# Altium PCB DAP-PCB-REV-2.PcbDoc (part 3 of 4)
Units mil, origin at the board's own origin, x right, y up, seen from the top; angles counter-clockwise.
Board outline 2165.35 x 2165.35 mil, 6 copper layers (Top Layer (Sig), L2 (GND), L3 (Sig), L4 (Sig), L5 (GND), Bottom Layer (Sig)), stack 34.252 mil thick; 270 components, 172 nets, 891 pads, 299 vias.
Unrouted connection lines stored in the file: 138.
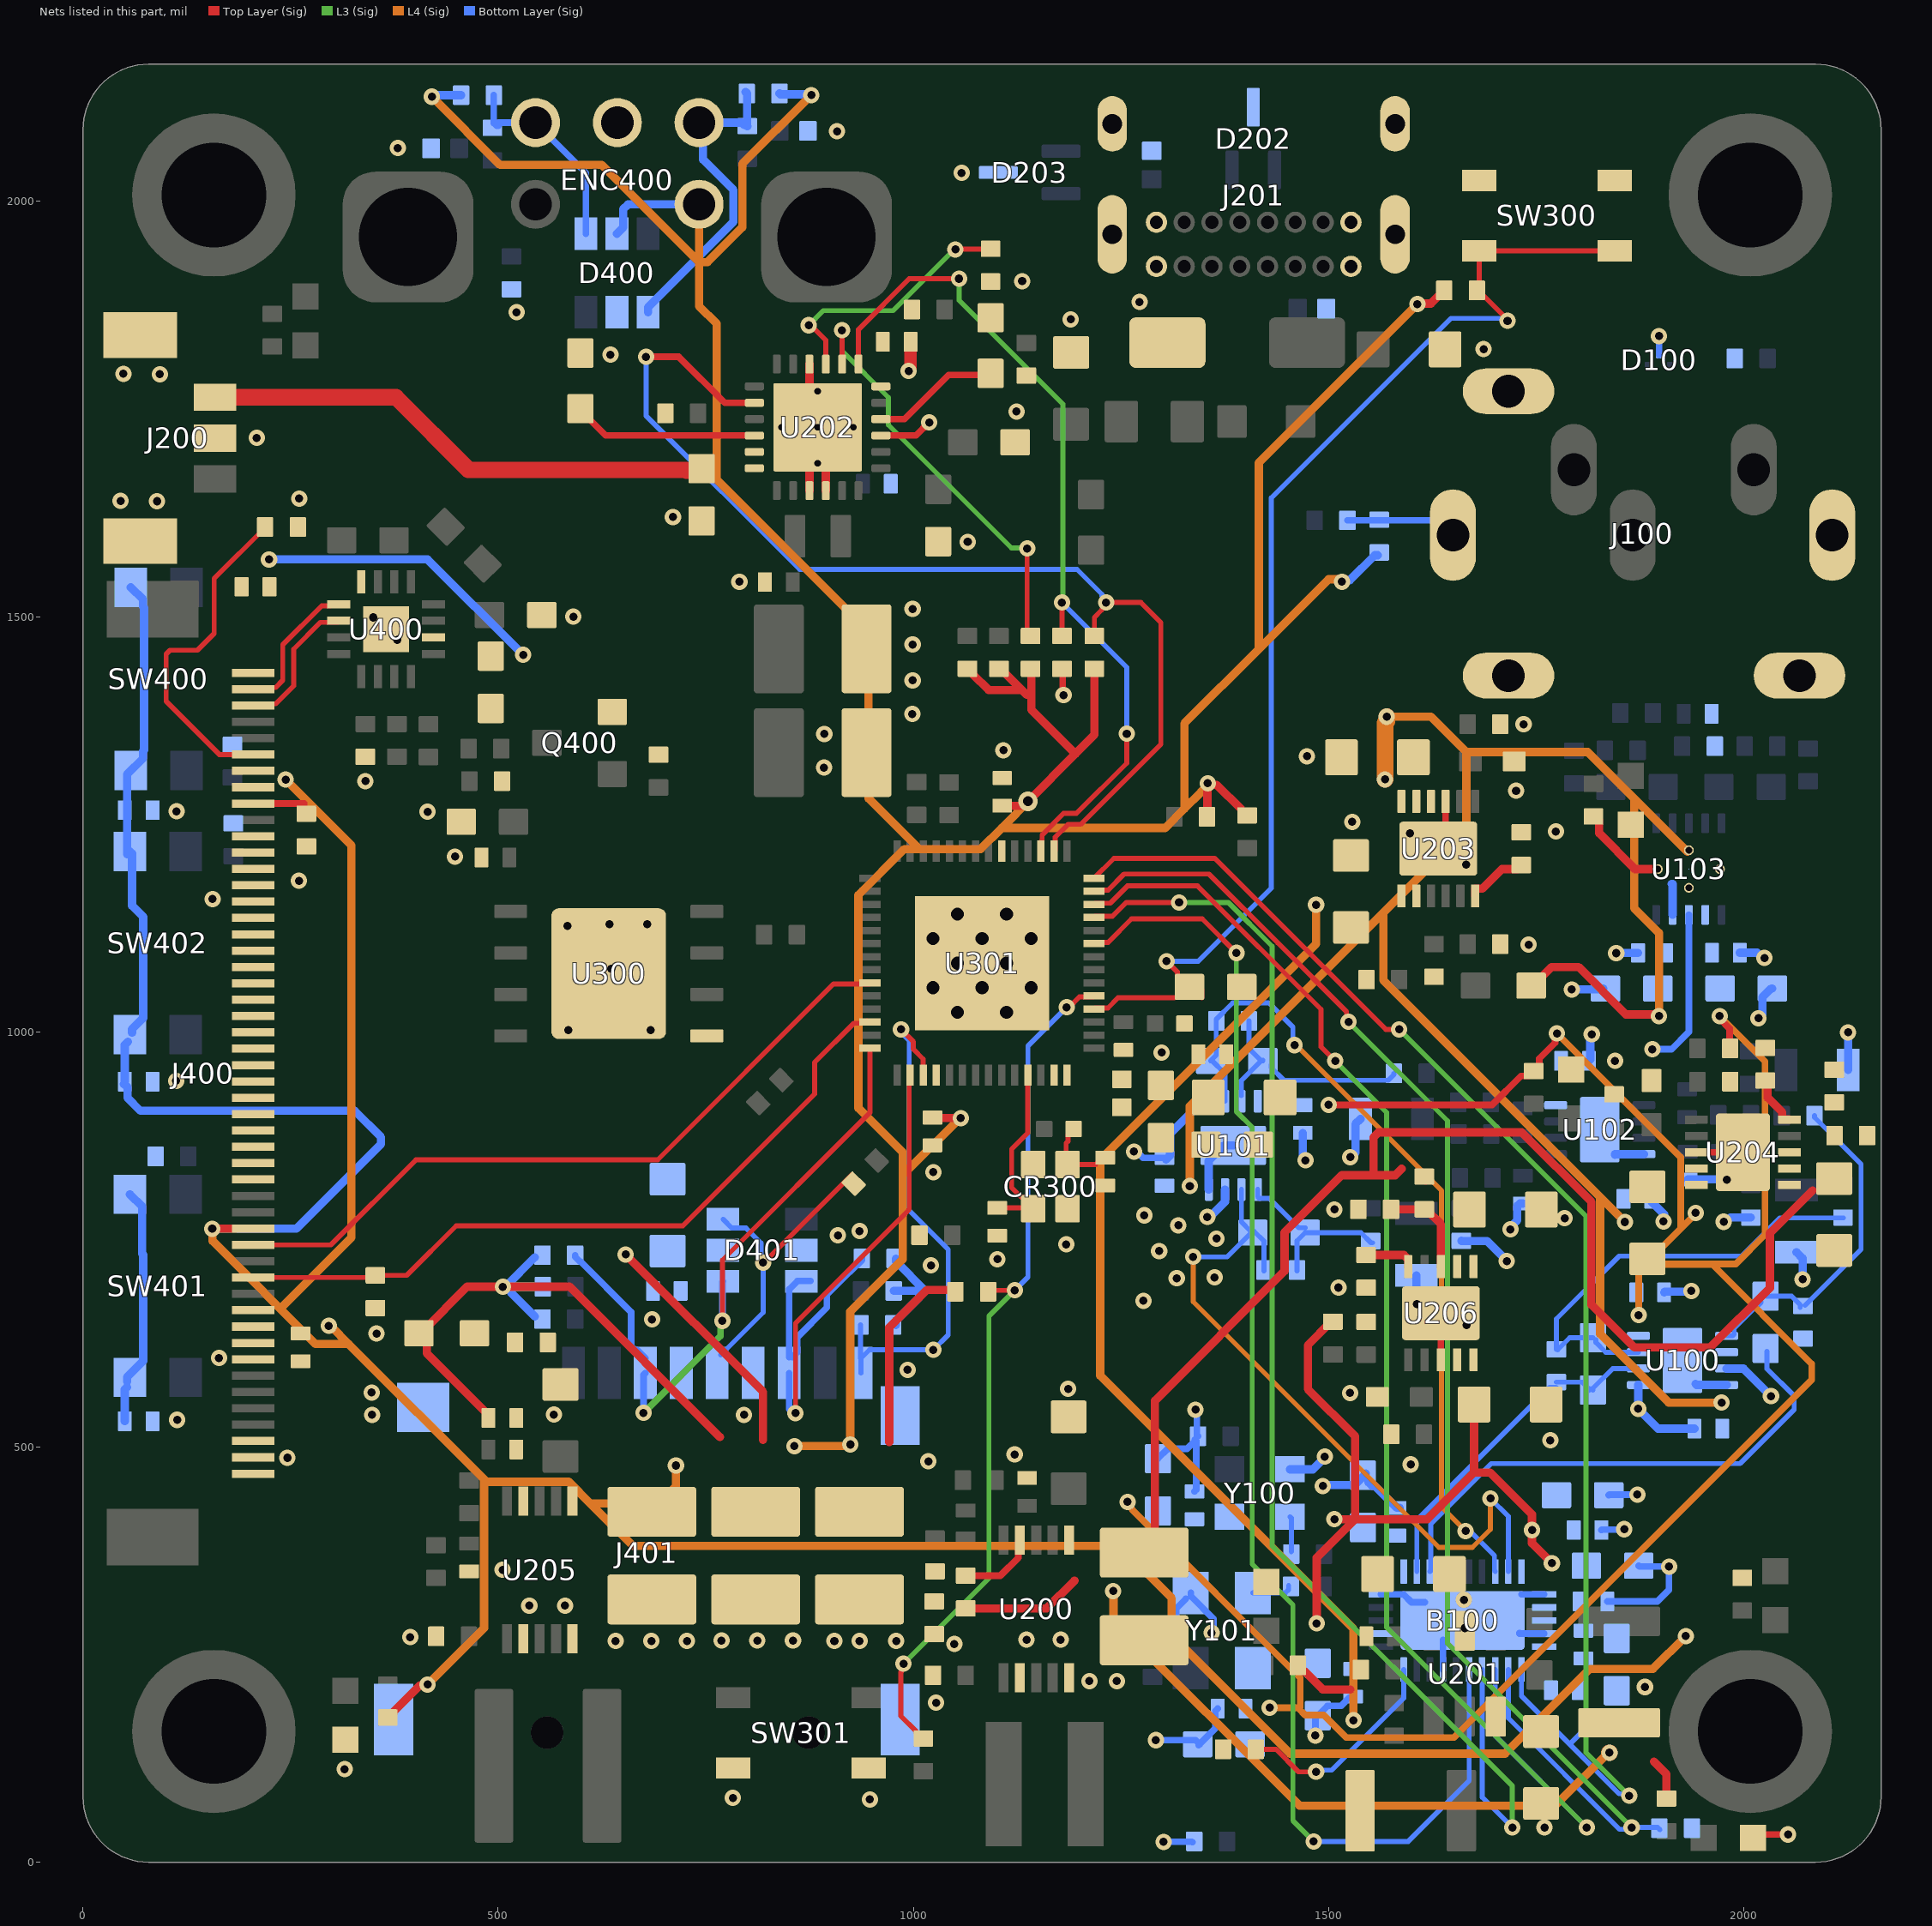
[diagram p6: the nets of this part, all layers, seen from the top]

## Via types
v1: diameter 19.68, hole 9.84, Top Layer (Sig) to Bottom Layer (Sig), tented both sides, 287 vias
v2: diameter 49.21, hole 29.53, Top Layer (Sig) to Bottom Layer (Sig), 6 vias
v3: diameter 15.75/15.75/15.75/15.75/15.75/15.75 (per signal layer), hole 7.87, Top Layer (Sig) to Bottom Layer (Sig), tented both sides, 5 vias
v4: diameter 23.62, hole 11.81, Top Layer (Sig) to Bottom Layer (Sig), tented both sides, 1 vias

## Nets (pads, with @x,y where several pads share a name; then routed paths per layer and width w, separated by ;. In a path a pad name is that pad's centre, name@x,y a point inside that pad or via, vN(x,y) a via of type N, cw(c..) or ccw(c..) an arc to the next point about the centre after c; other vN are vias at no path point) (continued)
FB_BB_3.9: (continued)
  Top Layer (Sig) w7.99: R212.2@1025,314 R212.2@1025.5,314.5 ; R213.2@1025.5,345.5 R213.2@1026,346 ; R200.1@1063,345 1104.73,345 1126.31,366.58 1126.31,385.94 U200.9@1128.32,387.95
GND: B100.11 B100.14 B100.22 B100.30 B100.31 C102.1 C103.1 C104.1 C105.1 C108.1 C109.1 C110.1 C111.1 C112.1 C113.1 C114.1 C115.1 C116.1 C117.1 C119.1 C120.1 C121.1 C122.1 C125.1 C126.1 C127.1 C128.1 C129.1 C130.1 C131.1 C132.2 C133.1 C134.1 C135.1 C136.1 C137.2 C139.1 C200.1 C202.1 C203.1 C204.1 C206.1 C208.1 C209.1 C210.1 C211.1 C213.1 C214.1 C215.1 C216.1 C217.1 C218.1 C219.1 C220.1 C221.1 C222.1 C223.2 C224.1 C227.1 C228.1 C229.1 C230.1 C231.1 C232.1 C233.2 C300.1 C301.1 C302.1 C303.1 C304.1 C305.1 C306.1 C307.1 C308.2 C309.1 C310.2 C311.1 C312.1 C400.1 C401.1 C402.1 C403.1 C404.1 C405.1 C407.1 C408.1 C409.1 C412.1 C413.1 CR300.2 CR300.4 D100.1 D201.C D202.3 D203.3 D205.A D206.C D207.C D208.A D209.C D400.2 D401.2 ENC400.2 J100.1 J100.SH1 J100.SH2 J100.SH3 J200.2 J200.4 J200.5 J201.A1 J201.A12 J201.B1 J201.B12 J201.S1 J201.S2 J201.S3 J201.S4 J400.11 J400.12 J400.13 J400.14 J400.15 J400.16 J400.17 J400.18 J400.19 J400.20 J400.21 J400.22 J400.23 J400.24 J400.25 J400.26 J400.27 J400.28 J400.29 J400.30 J400.31 J400.32 J400.43 J400.48 J400.49 J400.50 J401.6 J401.G1 J401.G2 J401.G3 J401.G4 Q400.2 R106.1 R107.1 R108.1 R111.1 R112.1 R113.1 R126.1 R129.1 R133.1 R135.2 R205.1 R207.1 R212.1 R215.1 R216.1 R217.1 R218.1 R221.1 R224.1 R226.1 R228.1 R229.1 R230.1 R231.1 R232.1 R233.1 R234.1 R235.1 R239.1 R240.1 R245.1 R246.1 R247.1 R248.1 R308.1 R401.1 R402.1 R403.1 R404.1 R406.1 R412.1 R413.1 R422.1 R424.1 R425.1 SW300.1 SW300.2 SW301.3 SW301.4 U100.3 U100.5 U101.3 U101.5 U103.3 U200.2 U200.5 U201.2 U202.4 U202.15 U202.16 U202.25 U203.9 U203.13 U204.8 U204.11 U205.2 U205.5 U206.8 U206.11 U300.4 U300.9 U301.57 U400.12 U400.17 Y100.2 Y101.2 | length 2544.7
  Top Layer (Sig) w7.99: D206.C@2011.06,29 2015.43,33.38 2049.38,33.38 v1@2052,36
  Top Layer (Sig) w8: R221.1@1177,1438 1179.92,1435.08 1179.92,1406.41 v1(1180.85,1405.48) ; U203.13@1632.15,1220.56 1641.01,1229.42 U203.9@1641.01,1271.99 ; U206.11@1635,641 1635.32,641 U206.8@1635.32,605.11 ; U204.8@1942.9,855 U204.11@1985,855
  Top Layer (Sig) w10: U202.25@874,1769 874.85,1769.85 U202.4@874.85,1804.18 ; U202.15@874.85,1651.82 874.85,1686.85 U202.25@875,1687 ; U202.25@894,1684 894.54,1683.46 U202.16@894.54,1651.82
  Top Layer (Sig) w15: v1(994.26,1795.91) 994.26,1797.18 996.73,1799.65 C214.1@996.73,1831
  Bottom Layer (Sig) w7.99: v1(1265.73,855.84) 1268.9,855.84 1276.61,848.13 C110.1@1302.38,848.13 ; v1(1292,147) 1340,147 C105.1@1345,142 ; v1(1301.29,24.38) 1301.6,24.69 1335.31,24.69 R111.1@1336,24 ; v1(1890,979) 1913,979 1933.94,999.94 U103.3@1933.94,1140.88 ; D100.1@1898,1814.91 1898,1834 v1@1899,1835
  Bottom Layer (Sig) w8: R107.1@1288,262.68 1289.97,262.68 1316.46,289.17 1316.46,305.46 Y101.2@1328,317 ; C102.1@1294.5,485.99 1294.5,486.07 1306.25,497.82 1329.61,497.82 R106.1@1339.89,508.11 ; Y101.2@1334.11,324.27 1334.11,320.33 1361.54,292.9 1361.54,281.81 1359.16,279.43 v1(1359.16,276.26) ; C103.1@1338.5,446.46 1340.66,448.62 1340.66,507.34 R106.1@1339,509 ; v1(1339.84,545) 1341.33,543.51 1341.33,514.49 R106.1@1342.82,513 ; C105.1@1343.49,141.02 1363.66,161.19 1363.66,182.13 C104.1@1366.54,185 ; v1(1484.13,152.49) 1484.13,173.64 C113.1@1487,176.5 ; C113.1@1487,176.5 1498.75,188.33 1515.12,188.33 1524.79,198 C112.1@1528,198 ; B100.30@1562.95,322.55 1590.38,322.55 1599.93,313 B100.31@1616,313 ; B100.22@1637.76,232 B100.31@1637.76,267.76 ; B100.31@1730,276 1730,275.31 B100.14@1759.8,275.31 ; B100.31@1732.24,322.55 B100.11@1759.8,322.55 ; C116.1@1828.73,400 1829.23,400.5 1855.5,400.5 v1(1856,401) ; C119.1@1835.73,314 1896,314 1910,328 1910,354 v1@1911,355 ; C139.1@1837.5,442 1838.13,442.64 1869.64,442.64 v1@1870,443 ; C120.1@1873.5,357 1874.5,356 v1@1908,356
  Bottom Layer (Sig) w10: C110.1@1304.26,846.26 1309.19,851.19 1309.19,877.19 1330.91,898.91 1342.63,910.63 1355.61,910.63 1355.69,910.71 U101.5@1355.69,916.43 ; v1(1354,777) 1355.85,778.85 1358.93,778.85 1375.3,795.22 1375.3,810.05 U101.3@1375.38,810.13 ; Y100.2@1453.5,473.09 1481.09,473.09 1495.47,487.47 v1(1495.47,488.47) ; C111.1@1469,878.27 1469,852 v1@1473,848 ; v1(1493,453) 1494.08,454.08 1531.08,454.08 C115.1@1545,468 ; v1@1528,850 1532.41,854.41 1532.41,889.05 C127.1@1538.35,895 ; C115.1@1548,460 1548,457.53 1552.25,453.28 1555.52,453.28 C114.1@1582,426.73 C114.1@1585.5,426.73 ; C131.1@1605.95,706.6 1605.95,678.05 v1@1608,676 ; R126.1@1659.95,748.31 1660.16,748.1 1690.9,748.1 v1@1715,724 ; v1(1719,762) 1719,764.62 1727.13,772.75 1727.13,789.9 1730.5,793.27 C132.2@1733.95,793.27 ; v1(1792.77,1050.98) 1831,1050.98 C135.1@1831,1052 ; C126.1@1813.49,965 1815.24,966.76 1815.24,995.24 v1(1817,997) ; v1@1849,1094 1849,1095 C134.1@1872.8,1095 ; v1(1873,546) U100.5@1873.08,574.76 U100.5@1873.08,574.76 ; v1@1874,544 1875,544 1896.87,522.13 C108.1@1940.65,522.13 ; C125.1@1888.73,799 1888.73,795.56 1904,780.29 v1@1904,777 ; C109.1@1904.11,686.13 1905.04,687.07 1936.07,687.07 v1(1937,688) ; C137.2@1932.57,822.27 v1@1975.73,822.27 ; v1(1976,771.24) 1978.62,771.24 1983.69,776.31 R133.1@2008.57,776.31 ; U100.3@1979.38,594.45 1979.46,594.37 1999.76,594.37 v1(2032.83,561.3) ; C128.1@1995.27,1095.25 2016.13,1095.25 2022.38,1089 v1(2025,1089) ; v1@2019,1018 2022.5,1021.5 2022.5,1041.5 2033.25,1052.25 C129.1@2034.53,1052.25 ; C136.1@2063.57,734.6 2071,727.16 v1(2071,702) ; C130.1@2125.78,954.13 2125.78,995.78 v1@2128,998
  other v1: 2053.4,33.38 1760,41.84 947.62,75.48 782.62,77.48 315,112 1027.38,192.07 1881,211 1212,218 1245.03,218.03 1049.24,262.71 641.39,266.45 684.39,266.45 727.39,266.45 904.83,266.45 935.17,266.45 979.39,266.45 769,267 812,267 855,267 1136.38,267.92 1177.46,267.92 394,271 1663.99,282 537.46,308.92 580.46,308.92 1663,316 505.38,352.07 1910,356 1871.77,442.64 1599,479 1018.03,482.85 246,487 1122,491 1767,508 113.34,532.7 348.03,538.85 796.03,538.85 567,539 347.56,565.56 1526,565 1186.38,570.07 993,593 163.64,607.13 353.38,636.66 1666,647 685.31,653.67 1606.15,672.16 1276.94,676.19 1512,692 1317.17,703.33 1362.83,704.19 1021.06,718.69 1714.67,723.83 1101.09,726.1 1296,736 1184.09,744.1 1365,751 909.03,754.85 935.17,760 1319,767 1903.27,771.55 1784.38,775.56 1278,779 1507,786 1979.8,821.97 1024.09,831.1 1472.15,845.16 1526.15,849.16 112,941 1845,965 2125.75,999.45 584.51,1002.19 683.51,1002.19 2017.75,1016.45 636,1076 1846.4,1094.75 1741,1105 583.51,1127.63 634.18,1129.54 679.51,1129.63 156,1160 260,1182 1665.57,1201.37 448,1211 1598,1239 1773.8,1241.37 1528.52,1252.82 112.53,1265.58 415,1265 1725.87,1290.37 340,1302 892.28,1318.25 1474,1332 1108.44,1339.08 892.69,1358.83 1734.87,1370.37 998.68,1382.75 999.09,1423.34 999.09,1466.34 378.44,1472.08 349.44,1499.08 590.44,1500.08 999.09,1509.34 790.44,1542.08 1065.44,1590.08 710.43,1620.07 45.13,1639.42 89,1639 260.32,1642.26 209.13,1715.42 1124.16,1747.08 48.59,1792.45 92.46,1792.04 635.07,1815.55 1686.65,1822.26 1898,1838 1189.44,1858.08 522.08,1866.54 1272.44,1879.08 1131,1904 1057.98,2034.44 378.98,2064.44 907.98,2084.44
  other v3: 884.69,1684.69 841.39,1728 884.69,1728 928,1728 884.69,1771.31
GPIO1_DAC: B100.17 R112.2 U301.13 | length 1808
  Top Layer (Sig) w6: U301.13@1217.52,1169.29 1218.85,1170.62 1230.74,1170.62 1230.83,1170.71 1234.46,1170.71 1253.75,1190 1356,1190 1438.69,1107.31 1521.68,1024.32 1521.68,1014.32 v1(1524,1012)
  L3 (Sig) w5.98: v1(1524,1012) 1643.17,892.83 1643.17,263.68 v1(1865,41.84)
  Bottom Layer (Sig) w5.98: B100.17@1716.5,232 1716.5,173.5 1850.38,39.62 1862.38,39.62 1862.78,39.62 v1(1865,41.84) ; v1@1862.58,39.42 v1(1865,41.84) ; R112.2@1899,39 1896.16,41.84 v1(1865,41.84)
GPIO2_DAC: B100.16 R113.2 U301.14 | length 1743.4
  Top Layer (Sig) w6: U301.14@1217.52,1185.04 1241.48,1209 1363,1209 1569,1003 v1(1585,1003)
  L3 (Sig) w6: v1(1585,1003) 1810,778 1810,132 v1(1862,80)
  Bottom Layer (Sig) w6: B100.16@1732.24,232 1732.24,200.13 1790.69,141.69 ; R113.2@1813,163 1811.28,163 1790.69,142.4 1790.69,141.69 ; v1(1862,80) 1859.49,82.51 1849.86,82.51 1790.69,141.69
ILIM_BQ: R217.2 U202.22 | length 150.1
  Top Layer (Sig) w7.99: U202.22@960.87,1737.84 989.37,1737.84 1042.53,1791 R217.2@1089,1791
ILIM_DAC_LDO+: R246.2 U206.5 | length 61.5
  Top Layer (Sig) w10: R246.2@1545.32,731.21 1590.76,731.21 1595.95,726.02 U206.5@1595.95,717.32
ILIM_LDO+: R229.2 U204.5 | length 63
  Top Layer (Sig) w10: R229.2@2023.03,939 2028.84,933.19 2028.84,920.63 2046.32,903.15 2046.32,894.45 2046.4,894.37 U204.5@2055.1,894.37
ILIM_LDO-: R230.2 U203.6 | length 76.1
  Top Layer (Sig) w10: U203.6@1676.44,1163.65 1676.44,1172.35 1676.52,1172.43 1685.22,1172.43 1708.82,1196.03 1727.03,1196.03 R230.2@1732,1201
IM0: J400.6 R402.2 | length 412.7
  Top Layer (Sig) w6: J400.6@205,1333.98 164.02,1333.98 100,1398 100,1455 104.61,1459.61 137.88,1459.61 158,1479.72 158,1545.97 220.03,1608 R402.2@222,1608
IM3: J400.9 R403.2 | length 72.9
  Top Layer (Sig) w7.99: J400.9@205,1274.92 266,1274.92 R403.2@266,1263
INT_BQ: R210.1 U202.8 U301.16 | length 1334.3
  Top Layer (Sig) w6: U301.16@1169.29,1217.52 1170.62,1218.85 1170.62,1230.74 1170.71,1230.83 1170.71,1234.46 1186.25,1250 1201.77,1250 1298,1346.23 1298,1493 1274,1517 1235.87,1517 v1@1233.94,1515.06 ; R210.1@1218,1476.69 1218,1499.13 1226.61,1507.74 1226.61,1507.91 1232,1513.3 1232,1515.06 v1(1232,1517)
  Top Layer (Sig) w7.99: v1(678,1813) 717.31,1813 772.78,1757.53 U202.8@808.51,1757.53
  Bottom Layer (Sig) w6: v1(678,1813) 678,1742 863,1557 1197,1557 1227.06,1526.94 1227.06,1525.11 1233.53,1518.64 v1@1235.36,1518.64
ISET_BQ: R218.2 U202.10 | length 217.9
  Top Layer (Sig) w8: R218.2@603,1746 603,1744.57 629.41,1718.16 U202.10@808.51,1718.16
IV_L: C107.1 R103.2 R116.1 U101.7 | length 271.8
  Bottom Layer (Sig) w5.98: U101.7@1395,923 1395,941.23 1418.91,965.13 C107.1@1420.87,965.13 ; R103.2@1404.06,1013.13 1404.06,979.98 1418.04,966 C107.1@1420.87,966 ; C107.1@1431,960.55 1431,956.98 1446.34,941.63 1571.91,941.63 1578.76,948.48 R116.1@1578.76,950
IV_LB: C101.1 R101.2 R123.1 U101.1 | length 217.9
  Bottom Layer (Sig) w5.98: U101.1@1414.75,810.13 1414.75,801.32 1416.68,799.39 1428.65,799.39 1464.04,764 C101.1@1472,764 ; R101.2@1462,712 1462.06,712.06 1462.06,748.32 C101.1@1471.87,758.13 1538.84,758.13 1550.98,746 R123.1@1553,746
IV_R: C100.1 R100.2 R121.1 U100.1 | length 397.2
  Bottom Layer (Sig) w5.98: U100.1@1979.38,633.82 1986.59,633.82 1988.51,635.75 1988.51,642.96 2012.46,666.91 2013.62,666.91 2021,674.28 C100.1@2021,680 ; C100.1@2026.38,681.63 2057.6,681.63 2068,671.23 R100.2@2068,668 ; R100.2@2074,670.47 2141.37,737.84 2141.37,840.79 2085.13,897.03 R121.1@2085.13,899
IV_RB: C106.1 R102.2 R131.1 U100.7 | length 540.4
  Bottom Layer (Sig) w5.98: R102.2@1774.38,617.5 1774.38,654.38 1850,730 1997.35,730 2043.35,776 R131.1@2120,776 ; R102.2@1775.84,617 1790.47,631.63 C106.1@1818.38,631.63 ; C106.1@1822,629 1822,626.04 1833.91,614.13 U100.7@1873.08,614.13
JACK_DET: J100.4 R118.1 R119.2 | length 134.5
  Bottom Layer (Sig) w7.99: R119.2@1522.68,1616 1632.06,1616 J100.4@1649.8,1598.26
LDO_BQ: C214.2 R214.2 U202.24
LED1: J400.2 U400.13 | length 150
  Top Layer (Sig) w6: J400.2@225,1414 225.64,1414.64 231.89,1414.64 240.59,1423.34 240.59,1466.23 287.44,1513.08 297,1513.08 298.92,1515 U400.13@308,1515
LED2: J400.3 U400.14 | length 161.7
  Top Layer (Sig) w6: J400.3@214,1394 214.95,1394.95 231.89,1394.95 253.59,1416.65 253.59,1460.85 285.82,1493.08 306.08,1493.08 U400.14@308,1495